# Altium PCB attiny_lipo_alarm.PcbDoc
Units mm, origin at the board's own origin, x right, y up, seen from the top; angles counter-clockwise.
Board outline 21 x 12.5 mm, 2 copper layers (Top Layer, Bottom Layer); 32 components, 29 nets, 133 pads, 19 vias.
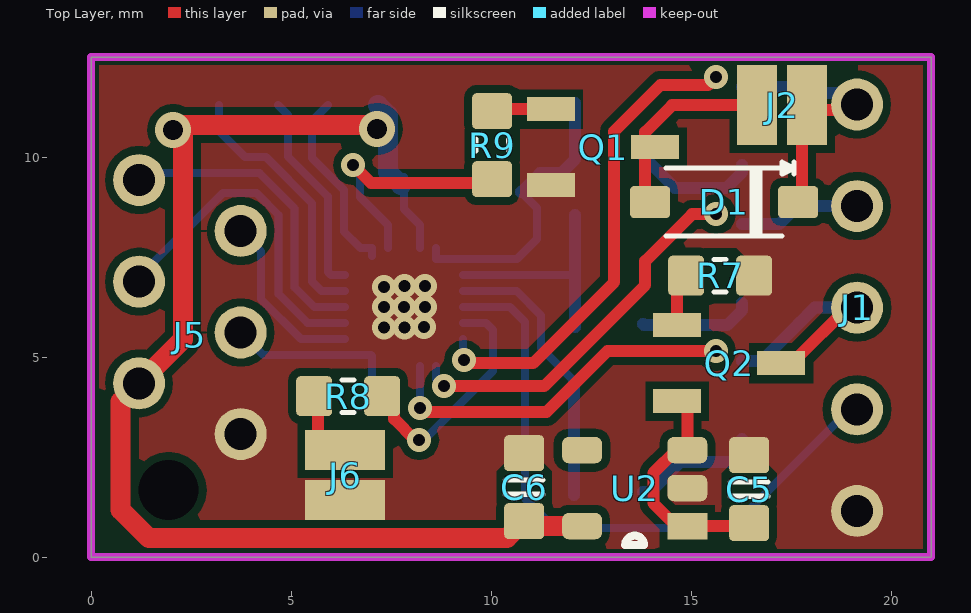
[diagram p0: Top Layer view]
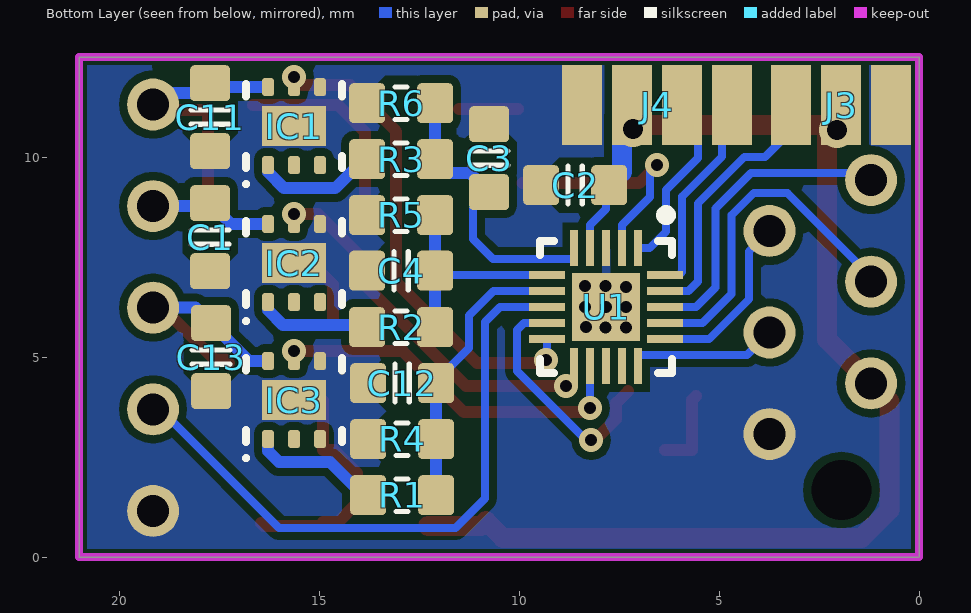
[diagram p1: Bottom Layer view, seen from below]

## Layer stack, top to bottom
Top Solder: solder mask 0.0102, Solder Resist, Dk 3.5
Top Layer: signal copper 0.0356
Dielectric 1: dielectric 0.32, FR-4, Dk 4.8
Bottom Layer: signal copper 0.0356
Bottom Solder: solder mask 0.0102, Solder Resist, Dk 3.5

## Board outline
0,12.5 21,12.5 21,0 0,0

## Design rules (kind name [scope] priority, off if disabled: settings)
Clearance ClearanceKeepOut [All vs OnLayer('Keep-Out Layer')] p1: gap=0.1 ignorepadtopadclearanceinfootprint=FALSE
Clearance [All] p2: gap=0.2 ignorepadtopadclearanceinfootprint=TRUE
PolygonConnect [All] p1: connectstyle=Direct reliefconductorwidth=0.254 reliefentries=4 polygonreliefangle="90 Angle" airgapwidth=0.254
RoomDefinition attiny_lipo_alarm [InComponentClass('attiny_lipo_alarm')] p1: confinementstyle=ConfineIn formatcopy=TRUE lockcomponents=FALSE outline -8.6,-22.5 52.72,-22.5 52.72,39.375 -8.6,39.375
RoutingVias [All] p1: holewidth=0.3 width=0.6 viastyle="Through Hole" minholewidth=0.3 minwidth=0.6 maxholewidth=1 maxwidth=3
SolderMaskExpansion SolderMaskExpansionVia [IsVia And (Not IsTestpoint)] p1: expansion=-5
SolderMaskExpansion [All] p2: expansion=0.102
Width [All] p1: maxlimit=1 minlimit=0.2 preferedwidth=0.3
30 further rules are at their usual default settings.

## Components (designator, comment, footprint, x,y, rotation, side; value= is the part's Value field where it differs from the comment)
C1 "1uF" CAPC1608X90N 17.725,8 r270 bottom
C2 "100n" CAPC1608X90N 8.6,9.3 r0 bottom
C3 "100n" CAPC1608X90N 10.75,9.975 r90 bottom
C4 "100n" CAPC1608X90N 12.95,7.16 r0 bottom
C5 "1uF" CAPC1608X90N 16.45,1.7 r90 top value=1u
C6 "1uF" CAPC1608X90N 10.825,1.75 r90 top value=1u
C11 "approved sub OK" CAPC1608X90N 17.725,11 r270 bottom value=1µ
C12 "100n" CAPC1608X90N 12.925,4.35 r0 bottom
C13 "approved sub OK" CAPC1608X90N 17.7,5 r270 bottom value=1µ
D1 "20V; 1A" SOD123 15.825,8.875 r180 top
IC1 "TPS22810DRVT" WSON-6 15.625,10.775 r90 bottom
IC2 "TPS22810DRVT" WSON-6 15.625,7.35 r90 bottom
IC3 "TPS22810DRVT" WSON-6 15.625,3.925 r90 bottom
J1 "BATTERY" PIN-HEADER-5-RA 19.15,11.315 r270 top
J2 "BUZZER" PADS-2-1020 17.9,11.3 r180 top
J3 "UPDI" PADS-3-1020 0.7,11.3 r0 bottom
J4 "UART" PADS-4-1020 8.425,11.3 r180 bottom
J5 "SPI" MICRO-MATCH-6 3.74,3.075 r270 top
J6 "LED" PADS-2-1020 6.35,2.675 r270 top
Q1 "=Value" SOT23-3 11.5,11.2 r0 top
Q2 "BSS84" SOT23-3 14.65,5.8 r0 top
R1 "1k" RESC1608X55N 12.925,1.55 r180 bottom value=20M
R2 "2k" RESC1608X55N 12.95,5.75 r180 bottom value=20M
R3 "3k" RESC1608X55N 12.95,9.95 r180 bottom value=20M
R4 "1k" RESC1608X55N 12.925,2.95 r0 bottom value=20M
R5 "1k" RESC1608X55N 12.95,8.55 r0 bottom value=20M
R6 "1k" RESC1608X55N 12.95,11.35 r0 bottom value=20M
R7 "100k" RESC1608X55N 15.725,7.037 r180 top value=20M
R8 "1k" RESC1608X55N 6.425,4.025 r180 top value=20M
R9 "1.5k?" RESC1608X55N 10.025,10.3 r90 top value=20M
U1 "ATTINY416" QFN40P300X300X90_HS-21M 7.825,6.25 r270 bottom
U2 "LDO-SOT23-5" SOT23-5 14.905,0.775 r180 top

## Footprints (in the part's own frame and the unit in brackets; to place one, negate y for a bottom-side part, rotate by r counter-clockwise, add the part's x,y. Pads: shape width x height; smd on the part's side, far side on the other; paste and mask are expansions set on the pad)
CAPC1608X90N [mm] "Chip Capacitor, Body 1.6x0.8mm, EIA 0603, IPC Medium Density"
  round 0.254 on Mech15: 0(0,0)
  rrect25% 0.9x1 smd: 1(-0.85,0) 2(0.85,0)
  Top Layer pour cut-out: -0.6,0.5 -0.4,0.7 0.4,0.7 0.6,0.5 0.6,-0.5 0.4,-0.7 -0.4,-0.7 -0.6,-0.5
  silkscreen extent -0.18,-0.48 0.18,0.48, body extent -0.85,-0.45 0.85,0.45, height 0.89
MICRO-MATCH-6 [mm]
  round 1.3 hole 0.8: 1(0,0) 2(-1.27,-2.54) 3(-2.54,0) 4(-3.81,-2.54) 5(-5.08,0) 6(-6.35,-2.54)
  round 0 hole 1.5 unplated: drill(1.4,-1.8)
  body extent -7.95,-3.77 1.6,1.23, height 4
PADS-2-1020 [mm]
  rect 1x2 smd: 1(0,0) 2(1.25,0)
PADS-3-1020 [mm]
  rect 1x2 smd: 1(0,0) 2(1.25,0) 3(2.5,0)
PADS-4-1020 [mm]
  rect 1x2 smd: 1(0,0) 2(1.25,0) 3(2.5,0) 4(3.75,0)
PIN-HEADER-5-RA [mm]
  round 1.3 hole 0.8: 1(0,0) 2(2.54,0) 3(5.08,0) 4(7.62,0) 5(10.16,0)
  body extent -1.27,-0.33 11.43,9.8, height 2.5
QFN40P300X300X90_HS-21M [mm] "QFN, 20-Leads, Body 3,00x3,00mm, Pitch 0,40mm, Thermal Pad 1,70x1,70mm, IPC Low Density"
  rect 0.9x0.2 smd: 1(-1.475,0.8) 2(-1.475,0.4) 3(-1.475,0) 4(-1.475,-0.4) 5(-1.475,-0.8) 11(1.475,-0.8) 12(1.475,-0.4) 13(1.475,0) 14(1.475,0.4) 15(1.475,0.8)
  rect 0.2x0.9 smd: 6(-0.8,-1.475) 7(-0.4,-1.475) 8(0,-1.475) 9(0.4,-1.475) 10(0.8,-1.475) 16(0.8,1.475) 17(0.4,1.475) 18(0,1.475) 19(-0.4,1.475) 20(-0.8,1.475)
  rect 1.7x1.7 smd: 21(0,0)
  silkscreen extent -2.42,-1.65 1.65,1.65, body extent -1.5,-1.5 1.5,1.5, height 0.9
RESC1608X55N [mm] "Chip Resistor, Body 1.6x0.8mm, EIA 0603, IPC Medium Density"
  round 0.254 on Mech15: 0(0,0)
  rrect25% 0.9x1 smd: 1(-0.85,0) 2(0.85,0)
  Top Layer pour cut-out: -0.6,0.5 -0.4,0.7 0.4,0.7 0.6,0.5 0.6,-0.5 0.4,-0.7 -0.4,-0.7 -0.6,-0.5
  silkscreen extent -0.15,-0.41 0.15,0.41, body extent -0.87,-0.47 0.88,0.48, height 0.54
SOD123 [mm] "SOD-123; 2 Leads; Body 2.7 x 1.6 mm, (LxW)"
  round 0.508 on Mech15: 0(0,0)
  rrect25% 1x0.8 smd: A(1.85,0) K(-1.85,0)
  silkscreen extent -1.75,-1 1.45,0.85, body extent -1.95,-0.9 1.95,0.9, height 1.18
SOT23-3 [mm]
  rect 1.2x0.6 smd: 1(0,0) 2(0,-1.9) 3(2.6,-0.95)
  body extent -0.1,-2.4 2.7,0.5, height 1.3
SOT23-5 [mm]
  rect 1x0.66 smd: 1(0,0)
  rrect50% 1x0.66 smd: 2(0,-0.95) 3(0,-1.9) 4(2.63,-1.9) 5(2.63,0)
  silkscreen extent 1.08,0.24 1.55,0.48, body extent 0.1,-2.47 2.6,0.53, height 1.11
WSON-6 [mm] "SON, 6-Leads, Body 2,00x2,00mm, Pitch 0,65mm, Thermal Pad 1,60x1mm, IPC Medium Density"
  rrect50% 0.45x0.3 smd: 1(-0.975,0.65) 2(-0.975,0) 3(-0.975,-0.65) 4(0.975,-0.65) 5(0.975,0) 6(0.975,0.65)
  rect 1x1.6 smd: 7(0,0)
  silkscreen extent -1.5,-1.2 1.05,1.25, body extent -1.01,-1 1.01,1, height 0.8

## Part data
C1: library part CAPC_100n_0603_X7R_50V_10%, "Capacitor SMD Cer 1uF 10% 50V X7R 0603", Manufacturer 1="AVX Corporation", Manufacturer 2="TDK Corporation", Manufacturer Part Number 1=06035C104KAT2A, Manufacturer Part Number 2=C1608X7R1H104K, Package / Case="0603 (1608 Metric)", Ratings="50V; X7R", Supplier Part Number 1=478-5052-1-ND, Tolerance=±10%, ComponentLink1Description=http://www.avx.com/docs/Catalogs/cx7r.pdf, ComponentLink1URL=http://www.avx.com/docs/Catalogs/cx7r.pdf, ComponentLink2Description=http://product.tdk.com/capacitor/mlcc/en/documents/mlcc_commercial_general_en.pdf, ComponentLink2URL=http://product.tdk.com/capacitor/mlcc/en/documents/mlcc_commercial_general_en.pdf, Material=ceramic, SCDType=spec, Supplier 1=Digi-Key, Supplier 2=Digi-Key, Supplier Part Number 2=445-1314-1-ND
C2 C3 C4 C12: library part CAPC_100n_0603_X7R_50V_10%, "Capacitor SMD Cer 100nF 10% 50V X7R 0603", Manufacturer 1="AVX Corporation", Manufacturer 2="TDK Corporation", Manufacturer Part Number 1=06035C104KAT2A, Manufacturer Part Number 2=C1608X7R1H104K, Package / Case="0603 (1608 Metric)", Ratings="50V; X7R", Supplier Part Number 1=478-5052-1-ND, Tolerance=±10%, ComponentLink1Description=http://www.avx.com/docs/Catalogs/cx7r.pdf, ComponentLink1URL=http://www.avx.com/docs/Catalogs/cx7r.pdf, ComponentLink2Description=http://product.tdk.com/capacitor/mlcc/en/documents/mlcc_commercial_general_en.pdf, ComponentLink2URL=http://product.tdk.com/capacitor/mlcc/en/documents/mlcc_commercial_general_en.pdf, Material=ceramic, SCDType=spec, Supplier 1=Digi-Key, Supplier 2=Digi-Key, Supplier Part Number 2=445-1314-1-ND
C5 C6: library part CAPC_2u2_0603_10V_10%, "Capacitor SMD Cer 2.2uF 10% 10V X5R 0603", Manufacturer 1="AVX Corporation", Manufacturer Part Number 1=0603ZD225KAT2A, Package / Case="0603 (1608 metric)", Ratings="10V; X5R", Supplier Part Number 1=478-6212-1-ND, Tolerance=±10%, ComponentLink1Description=http://www.avx.com/docs/Catalogs/cx5r.pdf, ComponentLink1URL=http://www.avx.com/docs/Catalogs/cx5r.pdf, Material=ceramic, SCDType=spec, Supplier 1=Digi-Key
C11 C13: library part CAPC_1u_0603_X7R_16V_10%, "Capacitor SMD Cer 1uF 10% 16V X7R 0603", Manufacturer 1="TDK Corporation", Manufacturer Part Number 1=C1608X7R1C105K, Package / Case="0603 (1608 metric)", Ratings="16V; X7R", Supplier Part Number 1=445-1604-1-ND, Tolerance=±10%, ComponentLink1Description=http://product.tdk.com/capacitor/mlcc/en/documents/mlcc_commercial_general_en.pdf, ComponentLink1URL=http://product.tdk.com/capacitor/mlcc/en/documents/mlcc_commercial_general_en.pdf, Material=ceramic, SCDType=spec, Supplier 1=Digi-Key
D1: library part DIODE_SCHOTTKY_40V_1A, "Diode Schottky SMD 20V 1A SOD123", Manufacturer 1="Diodes Inc", Manufacturer Part Number 1=1N5819HW-7-F, Package / Case=SOD123, Ratings="40V; 1A", Supplier Part Number 1=1N5819HW-FDICT-ND, Diode Type=Schottky, Material=Si, Mounting Type="Surface Mount", SCDType=spec, Supplier 1=Digi-Key
IC1 IC2 IC3: "Power Load Switch, 18Vin, 3A, 0.079R, WSON-6, High Side,  TPS22810, TEXAS INSTRUMENTS", Input Voltage Range="2.7V .. 18V", Manufacturer="Texas Instruments", On-Resistance=0.079R, Operating Temperature Range="-40°C .. 105°C", Package=WSON-6, Supplier Part Number 1=2769481, ComponentLink1Description=Datasheet, ComponentLink1URL=http://www.ti.com/lit/ds/symlink/tps22810.pdf, Manufacturer Part Number=TPS22810DRVT, Number of Channels=1, Supplier 1=Farnell, Supplier 2=Mouser, Supplier Part Number 2=595-TPS22810DRVT
J1: library part HEADER-5
J2 J6: library part HEADER-2
J3: library part HEADER-3
J4: library part HEADER-4
J5: library part HEADER-6
Q1: library part NPN_FMMT617TA, "Transistor SMD NPN 15V 3A SOT-23", Manufacturer 1=Diodes/Zetex, Manufacturer Part Number 1=FMMT617TA, Package / Case=SOT-23, Ratings="15V; 3A; 625mW", Supplier Part Number 1=FMMT617CT-ND, SCDType=spec, Supplier 1=Digi-Key
Q2: library part MOSFET_BSS84, "MOSFET SMD P-CH 50V 130mA SOT23-3", Current - Continuous Drain (Id) @ 25° C=130mA, Drain to Source Voltage (Vdss)=50V, Input Capacitance (Ciss) @ Vds="73pF @ 25V", Manufacturer 1="Fairchild Semiconductor", Package / Case=SOT23-3, Power - Max=360mW, Ratings="50V; 130mA", Supplier Device Package=SOT-23, Supplier Part Number 1=BSS84CT-ND, ComponentLink1Description=http://www.fairchildsemi.com/ds/BS/BSS84.pdf, ComponentLink1URL=http://www.fairchildsemi.com/ds/BS/BSS84.pdf, FET Feature="Logic Level Gate", FET Type="MOSFET P-Channel, Metal Oxide", Gate Charge (Qg) @ Vgs="1.3nC @ 5V", Manufacturer Part Number 1=BSS84, Material="Metal Oxide", Rds On (Max) @ Id, Vgs="10 Ohm @ 100mA, 5V", SCDType=undef, Supplier 1=Digi-Key, Vgs(th) (Max) @ Id="2V @ 1mA"
R1 R2 R3 R4 R5 R6 R7 R8 R9: library part RES_1K_0603_5%, "Resistor SMD chip 1k Ohm 0.1W 5% 0603", Manufacturer 1=Yageo, Manufacturer 2="Vishay Dale", Manufacturer Part Number 1=RC0603JR-071KL, Manufacturer Part Number 2=CRCW06031K00JNEA, Package / Case="0603 (1608 metric)", Ratings="1/10 W", Supplier Part Number 1=311-1.0KGRCT-ND, Tolerance=±5%, ComponentLink1Description=http://www.yageo.com/documents/recent/PYu-RC0603_51_RoHS_L_4.pdf, ComponentLink1URL=http://www.yageo.com/documents/recent/PYu-RC0603_51_RoHS_L_4.pdf, ComponentLink2Description=http://www.vishay.com/doc?20008, ComponentLink2URL=http://www.vishay.com/doc?20008, Material="Thick Film", SCDType=spec, Supplier 1=Digi-Key, Supplier 2=Digi-Key, Supplier Part Number 2=541-1.0KGCT-ND

## Via types
v1: diameter 0.6, hole 0.3, Top Layer to Bottom Layer, 17 vias
v2: diameter 0.9, hole 0.5, Top Layer to Bottom Layer, 2 vias

## Nets (pads, with @x,y where several pads share a name; then routed paths per layer and width w, separated by ;. In a path a pad name is that pad's centre, name@x,y a point inside that pad or via, vN(x,y) a via of type N, cw(c..) or ccw(c..) an arc to the next point about the centre after c; other vN are vias at no path point)
5V: C2.1 C6.1 J3.2 J4.2 J5.2 U1.4 U2.5 | length 31.2
  Top Layer w0.5: v2@6.975,10.8 2.3,10.8 2.3,5.445 J5.2 0.74,3.885 0.74,1.178 1.443,0.475 10.4,0.475 C6.1 10.95,0.775 U2.5
  Bottom Layer w0.2: C2.1@7.825,9.5 7.825,8.7 8.225,8.3 U1.4
  Bottom Layer w0.5: J4.2 7.425,11.05 7.425,9.625 C2.1
  other v2: 2.05,10.675 7.15,10.7
ADC2: C12.1 R1.2 R4.1 U1.7 | length 7.1
  Bottom Layer w0.2: U1.7 10.64,6.65 11.25,6.039 11.25,5.225 C12.1@12.125,4.35
  Bottom Layer w0.3: R1.2 R4.1 C12.1
ADC3: C4.1 R2.2 R5.1 U1.6 | length 5.6
  Bottom Layer w0.2: U1.6 11.99,7.05 C4.1
  Bottom Layer w0.3: R2.2 C4.1 R5.1
ADC4: C3.1 R3.2 R6.1 U1.5 | length 7.4
  Bottom Layer w0.2: U1.5 8.625,7.45 10.65,7.45 11.15,7.95 11.15,8.725 C3.1
  Bottom Layer w0.3: C3.1 11.225,9.6 11.75,9.6 R3.2 R6.1
EN_S2: IC3.5 U1.12 | length 9.3
  Top Layer w0.3: v1@8.225,3.625 11.382,3.625 12.907,5.15 v1(15.625,5.15)
  Bottom Layer w0.2: v1@8.225,3.55 U1.12
  other v1: 8.225,3.725
EN_S3: IC2.5 U1.11 | length 9.7
  Top Layer w0.3: v1(8.825,4.275) 11.325,4.275 13.85,6.8 13.85,7.4 15.025,8.575 v1(15.625,8.575)
  Bottom Layer w0.2: U1.11 8.625,4.45 v1@8.95,4.125
EN_S4: IC1.5 U1.10 | length 12
  Top Layer w0.3: v1@9.325,4.85 11.05,4.85 13.075,6.875 13.075,10.645 14.23,11.8 15.425,11.8 v1(15.625,12)
  Bottom Layer w0.2: v1@9.3,4.875 U1.10
  other v1: 9.325,4.925
GND: C1.2 C2.2 C3.2 C4.2 C5.2 C6.2 C11.2 C12.2 C13.2 IC1.4 IC1.7 IC2.4 IC2.7 IC3.4 IC3.7 J1.5 J3.1 J4.1 J5.1 J6.2 Q1.2 R4.2 R5.2 R6.2 R7.1 U1.3 U1.21 U2.2
  other v1: 7.325,5.735 7.835,5.734 8.326,5.75 7.325,6.255 7.825,6.255 8.35,6.255 7.325,6.75 7.835,6.775 8.35,6.775
MISO: J5.5 U1.16 | length 4.4
  Bottom Layer w0.2: J5.5 4.25,7.645 4.25,6.448 5.248,5.45 U1.16
MOSI: J5.4 U1.17 | length 8.6
  Bottom Layer w0.2: J5.4 1.2,7.01 3.295,9.105 4.133,9.105 4.69,8.549 4.69,6.574 5.414,5.85 U1.17
NetD1_A: D1.A J2.2 Q1.3 | length 4.8
  Top Layer w0.3: D1.A@13.85,8.875 13.85,10.625 14.525,11.3 J2.2
NetIC1_1: IC1.1 R3.1 | length 3.1
  Bottom Layer w0.3: R3.1@13.8,10.025 14.6,9.225 15.876,9.225 16.275,9.624 IC1.1
NetIC2_1: IC2.1 R2.1 | length 2.8
  Bottom Layer w0.3: R2.1@13.8,5.825 13.825,5.8 15.901,5.8 16.275,6.174 IC2.1@16.275,6.35
NetIC3_1: IC3.1 R1.1 | length 3.2
  Bottom Layer w0.3: R1.1@13.8,1.625 13.974,1.625 14.724,2.375 16,2.375 16.275,2.65 IC3.1
NetJ6_1: J6.1 R8.2 | length 2.1
  Top Layer w0.3: R8.2 5.675,3.925 5.675,2.675 J6.1
NetQ1_1: Q1.1 R9.2 | length 1.5
  Top Layer w0.3: R9.2@10.025,11.2 Q1.1
NetQ2_1: Q2.1 R7.2 | length 1.3
  Top Layer w0.3: Q2.1 14.65,6.812 R7.2
RX: J4.3 U1.1 | length 4.7
  Bottom Layer w0.2: J4.3 5.525,10.9 5.525,9.976 6.325,9.176 6.325,8.135 6.735,7.725 U1.1 U1.1@7.025,7.525
S1: J1.4 U1.8 | length 16
  Bottom Layer w0.2: U1.8 10.474,6.25 10.85,5.874 10.85,5.377 10.85,1.467 11.592,0.725 16,0.725 18.825,3.55 18.825,3.695 J1.4
S2: C13.1 IC3.6 J1.3 Q2.3 | length 5.9
  Top Layer w0.3: Q2.3 17.342,4.942 17.617,4.942 18.91,6.235 J1.3
  Bottom Layer w0.3: IC3.6 16.75,4.9 C13.1 18.085,6.235 J1.3
S2_OUT: C5.1 Q2.2 U2.1 U2.3 | length 5.8
  Top Layer w0.3: Q2.2@14.905,3.916 U2.3 14.627,2.675 14.055,2.103 14.055,1.347 14.527,0.875 14.905,0.875 U2.1 16.375,0.775 C5.1
S3: C1.1 IC2.6 J1.2 | length 3.1
  Bottom Layer w0.3: IC2.6 17.2,8.325 C1.1 17.8,8.775 J1.2
S4: C11.1 D1.K IC1.6 J1.1 J2.1 | length 7
  Top Layer w0.3: D1.K@17.45,8.85 17.775,9.175 17.775,11.175 19.01,11.175 J1.1
  Bottom Layer w0.3: IC1.6 17.625,11.75 C11.1 17.975,11.6 18.865,11.6 J1.1
SCK: J5.3 U1.15 | length 4.1
  Bottom Layer w0.2: J5.3 4.305,5.05 7,5.05 7.025,5.025 U1.15 U1.15@7.025,4.5
SSEL: J5.6 U1.18 | length 7.8
  Bottom Layer w0.2: J5.6 1.375,9.6 4.204,9.6 5.09,8.714 5.09,6.74 5.58,6.25 U1.18
TX: J4.4 U1.20 | length 5.1
  Bottom Layer w0.2: J4.4 4.925,11.05 4.925,10.011 5.925,9.011 5.925,7.125 6,7.05 U1.20
UPDI: J3.3 U1.19 | length 6.6
  Bottom Layer w0.2: J3.3 3.2,10.65 3.85,10 4.37,10 5.525,8.845 5.525,6.889 5.764,6.65 U1.19
WO2: R8.1 U1.9 | length 6
  Top Layer w0.3: R8.1@7.275,4.15 7.575,3.85 7.575,3.456 8.106,2.925 v1(8.2,2.925)
  Bottom Layer w0.2: v1@8.3,2.925 8.324,2.925 10.05,4.651 10.05,5.674 9.874,5.85 U1.9
WO3: R9.1 U1.2 | length 6
  Top Layer w0.3: v1(6.55,9.8) 7,9.35 R9.1@9.92,9.35
  Bottom Layer w0.2: v1(6.55,9.8) 6.725,9.625 6.725,8.999 7.425,8.299 U1.2
pads on no net: C1.0 C2.0 C3.0 C4.0 C5.0 C6.0 C11.0 C12.0 C13.0 D1.0 IC1.2 IC1.3 IC2.2 IC2.3 IC3.2 IC3.3 J5.drill R1.0 R2.0 R3.0 R4.0 R5.0 R6.0 R7.0 R8.0 R9.0 U1.13 U1.14 U2.4

## Polygon pours and split planes (outlines as drawn)
GND on Bottom Layer "Top Layer-GND" (solid, pour order 20): 0,12.5 0,0 21,0 21,12.5
GND on Top Layer "Bottom Layer-GND" (solid, pour order 18): 0,12.5 0,0 21,0 21,12.5

## Keep-outs
Keep-Out Layer:
  the board outline again, w0.2